# Altium PCB PCIE.PcbDoc
Units mil, origin at the board's own origin, x right, y up, seen from the top; angles counter-clockwise.
Board outline 6000 x 4000 mil, 2 copper layers (Top Layer, Bottom Layer); 2 components, 23 nets, 74 pads, 54 vias.
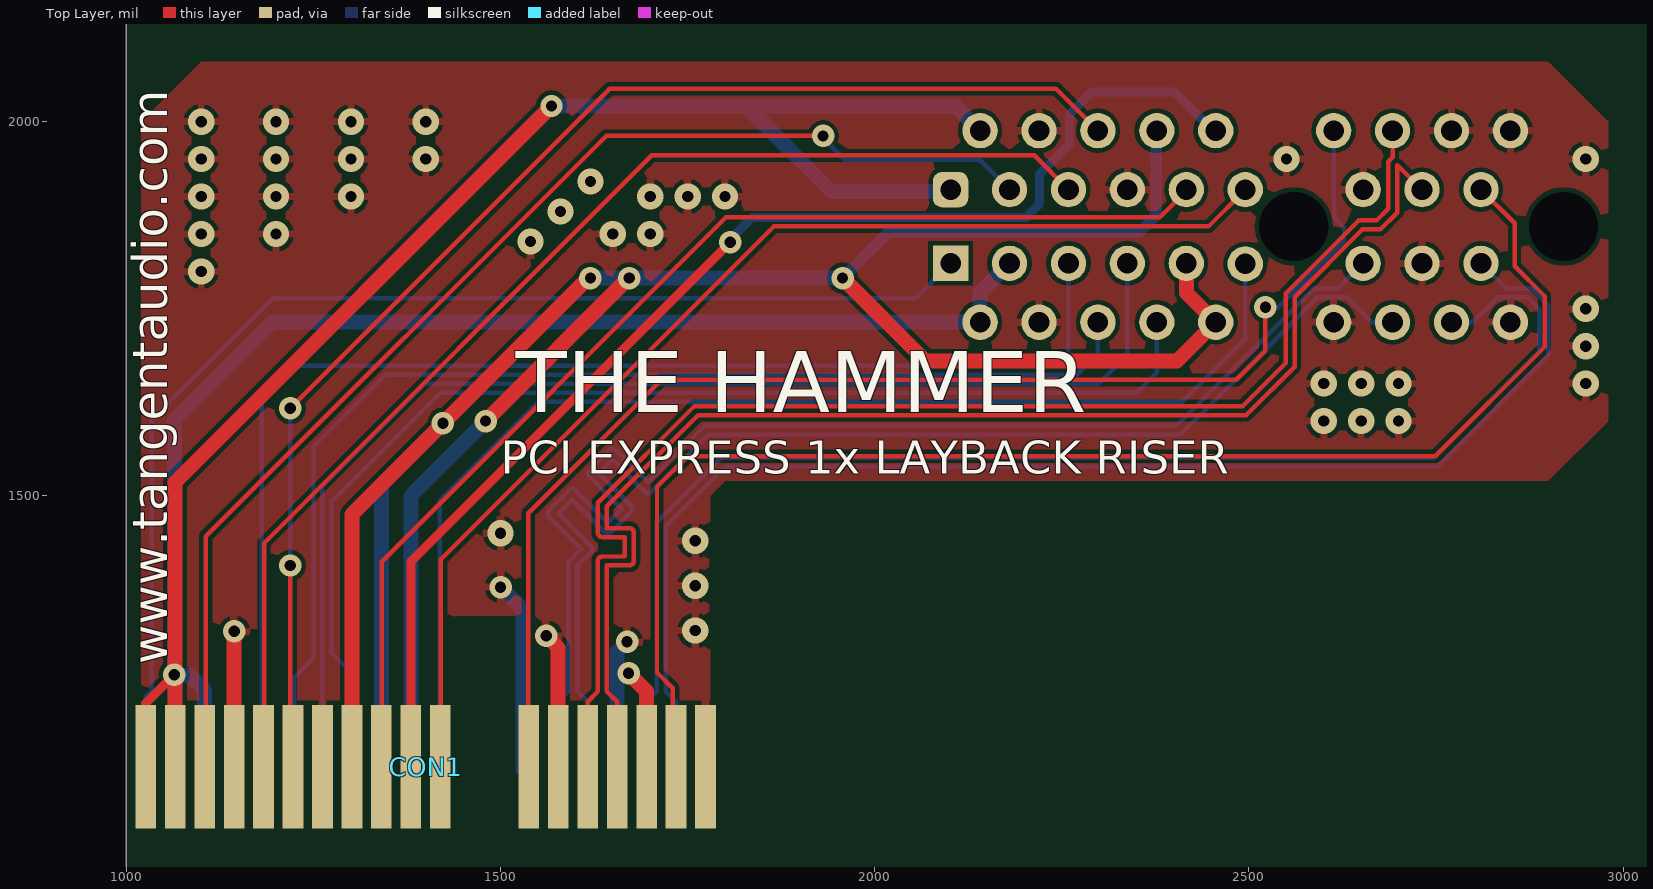
[diagram p0: Top Layer view]
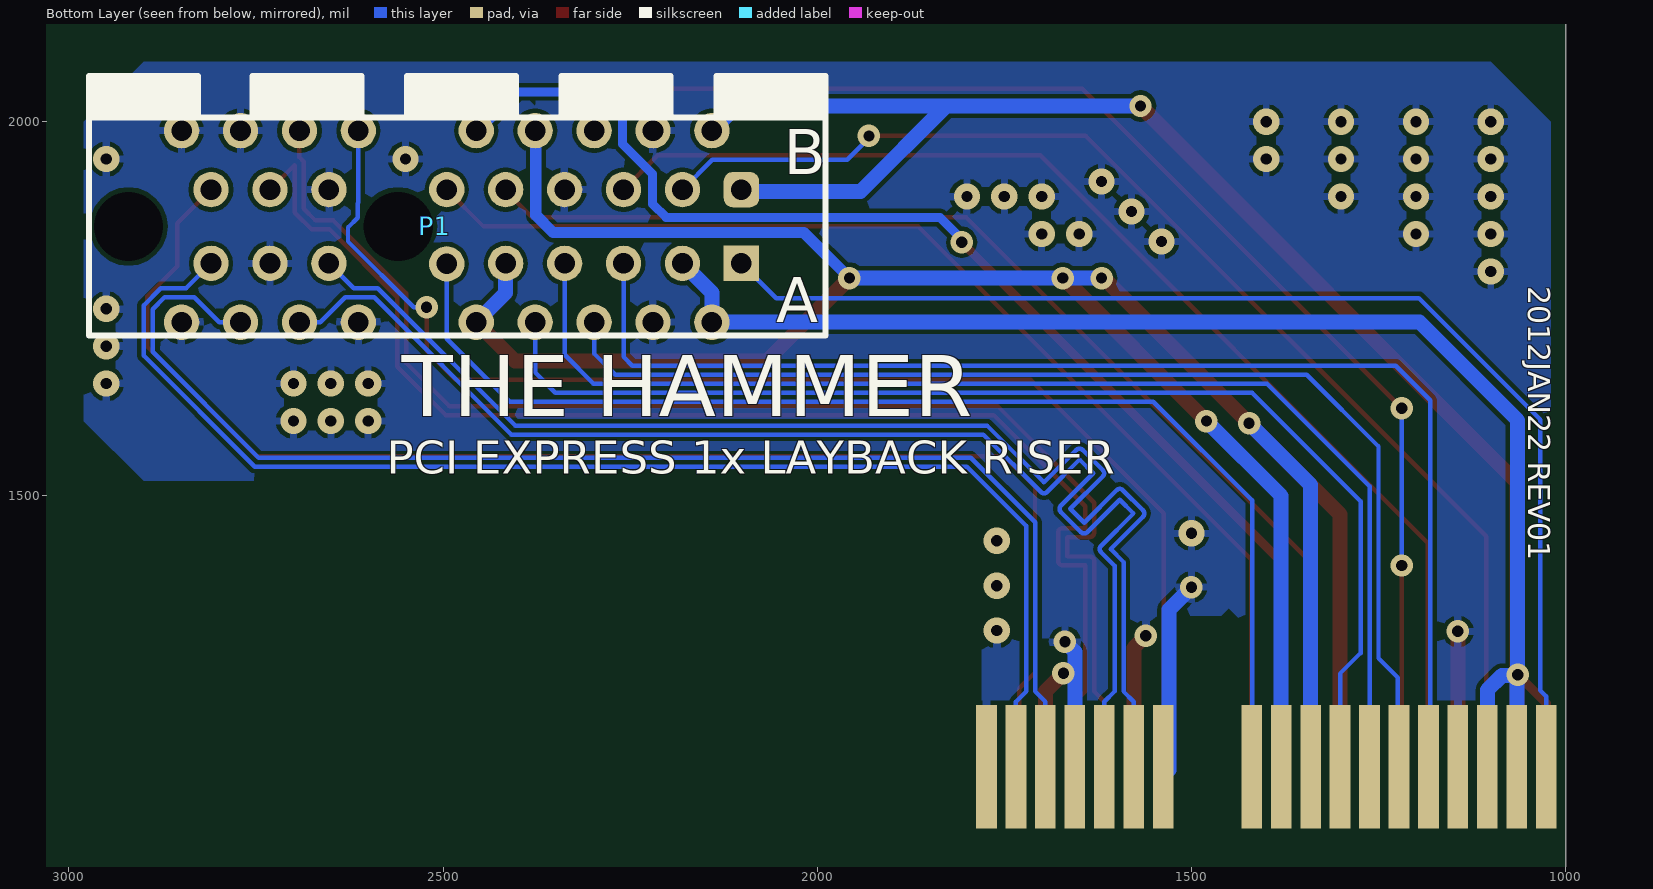
[diagram p1: Bottom Layer view, seen from below]

## Layer stack, top to bottom
Top Layer: signal copper 1.4
Dielectric: dielectric 12.6, FR-4, Dk 4.8
Bottom Layer: signal copper 1.4

## Board outline
1000,1000 7000,1000 7000,5000 1000,5000

## Design rules (kind name [scope] priority, off if disabled: settings)
Clearance [All] p1: gap=6
ComponentClearance [All] p1: gap=10 collisioncheckmode=3 verticalgap=10
DiffPairsRouting [All] p1: maxlimit=25 minlimit=6 mostfreqgap=10 toplayer_prefgap=6 bottomlayer_prefgap=6 maxuncoupledlength=500
HoleSize [All] p1: absolutevalues=TRUE maxlimit=125 minlimit=13 maxpercent=80.000 minpercent=20.000
MinimumAnnularRing [All] p1: minimumring=7
PolygonConnect [All] p1: connectstyle=Relief reliefconductorwidth=10 reliefentries=4 polygonreliefangle="90 Angle"
RoutingCorners [All] p1: cornerstyle=Round minsetback=100 maxsetback=100
RoutingVias [All] p1: holewidth=15 width=30 viastyle="Through Hole" minholewidth=15 minwidth=30 maxholewidth=15 maxwidth=30
SolderMaskExpansion [All] p1: expansion=4
TestPointUsage [All] p1: valid=0 allowmultiple=FALSE
Testpoint [All] p1: side=15 testpointundercomponent=TRUE minsize=40 maxsize=100 preferedsize=60 minholesize=0 maxholesize=40 preferedholesize=32 testpointgrid=1 style=1023 order=0-112345678
Width [All] p1: maxlimit=20 minlimit=6 preferedwidth=8
15 further rules are at their usual default settings.

## Classes and differential pairs
differential pair REFCLK: +REFCLK_P -REFCLK_N
differential pair HSO: +HSO_P -HSO_N
differential pair HSL: +HSL_P -HSL_N

## Components (designator, comment, footprint, x,y, rotation, side; value= is the part's Value field where it differs from the comment)
CON1 "PCIE_1X" PCIE_1X_EDGE 1025.79,1138.03 r0 top
P1 "PCIE_1X" NWE18DHHN-T931 2560,1860 r0 bottom

## Footprints (in the part's own frame and the unit in brackets; to place one, negate y for a bottom-side part, rotate by r counter-clockwise, add the part's x,y. Pads: shape width x height; smd on the part's side, far side on the other; paste and mask are expansions set on the pad)
NWE18DHHN-T931 [mm] "Sullins PCIe 1x through hole"
  rect 1.2x1.2 hole 0.7: A1(-11.65,1.25)
  round 1.2 hole 0.7: A2(-10.65,3.25) A3(-9.65,1.25) A4(-8.65,3.25) A5(-7.65,1.25) A6(-6.65,3.25) A7(-5.65,1.25) A8(-4.65,3.25) A9(-3.65,1.25) A10(-2.65,3.25) A11(-1.65,1.27) A12(1.35,3.25) A13(2.35,1.25) A14(3.35,3.25) A15(4.35,1.25) A16(5.35,3.25) A17(6.35,1.25) A18(7.35,3.25) B2(-10.65,-3.25) B3(-9.65,-1.25) B4(-8.65,-3.25) B5(-7.65,-1.25) B6(-6.65,-3.25) B7(-5.65,-1.25) B8(-4.65,-3.25) B9(-3.65,-1.25) B10(-2.65,-3.25) B11(-1.65,-1.25) B12(1.35,-3.25) B13(2.35,-1.25) B14(3.35,-3.25) B15(4.35,-1.25) B16(5.35,-3.25) B17(6.35,-1.25) B18(7.35,-3.25)
  rrect50% 1.2x1.2 hole 0.7: B1(-11.65,-1.25)
  round 0 hole 2.35 unplated: ""(0,0) ""(9.15,0)
  silkscreen extent -14.5,-5.1 10.5,3.7
PCIE_1X_EDGE [mm]
  rect 0.7x4.2 smd far side: A1(0,0) A2(1,0) A3(2,0) A4(3,0) A5(4,0) A6(5,0) A7(6,0) A8(7,0) A9(8,0) A10(9,0) A11(10,0) A12(13,0) A13(14,0) A14(15,0) A15(16,0) A16(17,0) A17(18,0) A18(19,0)
  rect 0.7x4.2 smd: B1(0,0) B2(1,0) B3(2,0) B4(3,0) B5(4,0) B6(5,0) B7(6,0) B8(7,0) B9(8,0) B10(9,0) B11(10,0) B12(13,0) B13(14,0) B14(15,0) B15(16,0) B16(17,0) B17(18,0) B18(19,0)

## Via types
v1: diameter 35, hole 15, Top Layer to Bottom Layer, 34 vias
v2: diameter 30, hole 15, Top Layer to Bottom Layer, 16 vias
v3: diameter 35, hole 15, Top Layer to Bottom Layer, tented both sides, 3 vias
v4: diameter 30, hole 15, Top Layer to Bottom Layer, tented both sides, 1 vias

## Nets (pads, with @x,y where several pads share a name; then routed paths per layer and width w, separated by ;. In a path a pad name is that pad's centre, name@x,y a point inside that pad or via, vN(x,y) a via of type N, cw(c..) or ccw(c..) an arc to the next point about the centre after c; other vN are vias at no path point)
+3.3V: CON1.A9 CON1.A10 CON1.B8 P1.A9 P1.A10 P1.B8 | length 3713.6
  Top Layer w20: CON1.B8 1301.38,1475.38 1617,1791 v2(1620,1791) ; v2(1480,1600) v2@1671,1791 ; v2(1957,1791) 2068,1680 2403.62,1680 P1.A10 2416.3,1771.42 P1.A9
  Bottom Layer w15: v2(1957,1791) 2018,1852 2353,1852 2376,1875 2376,1987.02 P1.B8
  Bottom Layer w20: CON1.A9 1340.75,1514.75 v2(1423,1597) ; CON1.A10 1380.12,1500.12 v2(1480,1600) ; v2(1620,1791) v2(1957,1791) ; P1.A9 2416.3,1771.42 P1.A10
  other v2: 1672,1791
+3.3VAUX: CON1.B10 P1.B10 | length 1680.5
  Top Layer w12: CON1.B10 1380.12,1412.12 v2(1807,1839)
  Bottom Layer w12: v2(1807,1839) 1810,1842 1810,1846 1836,1872 2202,1872 2220,1890 2220,1930 2260,1970 2260,2010 2290,2040 2400,2040 2452.05,1987.95 P1.B10
+12V: CON1.A2 CON1.A3 CON1.B1 CON1.B2 P1.A2 P1.A3 P1.B1 P1.B2 | length 3977.2
  Top Layer w12: CON1.B1 1025.79,1222.79 v2(1064,1261)
  Top Layer w20: CON1.B2 1065.16,1518.16 v2(1568,2021)
  Bottom Layer w20: CON1.A2 v2@1065.16,1259.84 ; CON1.A3 1104.53,1240.47 1085,1260 1065,1260 v2(1064,1261) 1064,1601 1195.05,1732.05 P1.A2 2140.71,1771.42 P1.A3 ; v2(1568,2021) 2107.66,2021 P1.B2 ; 1828,2021 1942,1907 2099.13,1907 P1.B1
B3_RSVD: CON1.B3 P1.B3 | length 1635.8
  Top Layer w6: CON1.B3 1106,1139.5 1106,1446 1641,1981 v2(1931,1981)
  Bottom Layer w6: v2(1931,1981) 1931,1978 1960,1949 2140.29,1949 P1.B3
B12_RSVD: CON1.B12 P1.B12 | length 1767.2
  Top Layer w6: CON1.B12 1537,1138.63 1537,1477 1715,1655 2483,1655 2522,1694 v4(2522,1752)
  Bottom Layer w6: v4(2522,1752) 2539,1752 2627,1840 2627,1858.73 2614,1871.73 2614,1891 2613.15,1891.85 P1.B12
GND: CON1.A4 CON1.A12 CON1.A15 CON1.A18 CON1.B4 CON1.B7 CON1.B13 CON1.B16 CON1.B18 P1.A4 P1.A12 P1.A15 P1.A18 P1.B4 P1.B7 P1.B13 P1.B16 P1.B18 | length 935.4
  Top Layer w20: CON1.B4@1144,1129 v2(1144,1319) ; v2(1561,1313) 1576.97,1297.03 CON1.B13 ; v2(1671,1263) 1695.08,1238.92 CON1.B16
  Bottom Layer w20: v2(1500,1378) 1530,1348 CON1.A12@1530,1134 ; CON1.A15 1655.71,1291.71 v2(1669,1305)
  other v1: 1760,1320 1760,1380 1760,1440 1500,1450 2600,1600 2650,1600 2700,1600 2600,1650 2650,1650 2700,1650 2950,1650 2950,1700 1100,1800 1540,1840 1100,1850 1200,1850 1650,1850 1700,1850 1580,1880 1100,1900 1200,1900 1300,1900 1700,1900 1750,1900 1800,1900 1620,1920 1100,1950 1200,1950 1300,1950 1400,1950 1100,2000 1200,2000 1300,2000 1400,2000
  other v3: 2950,1750 2550,1950 2950,1950
HSL_N: CON1.A17 P1.A17 | length 1781.3
  Bottom Layer w6: CON1.A17 1734.45,1225 1720.76,1238.68 1720.76,1459.79 1799.97,1539 2751.49,1539 2900,1687.51 2900,1754.49 2877.07,1777.42 2843.37,1777.42 P1.A17
HSL_P: CON1.A16 P1.A16 | length 1800.8
  Bottom Layer w6: CON1.A16 1695.08,1225 1708.76,1238.68 1708.76,1464.76 1795,1551 2746.51,1551 2888,1692.49 2888,1749.51 2872.1,1765.42 2843.37,1765.42 2832.37,1765.42 2799,1732.05 P1.A16
HSO_N: CON1.B15 P1.B15 | length 1803.6
  Top Layer w6: CON1.B15 1655.71,1225 1642.02,1238.68 1642.02,1407 1672.02,1407 ccw(c1672.02,1413) 1678.02,1413 1678.02,1451 ccw(c1672.02,1451) 1672.02,1457 1642.02,1457 1642.02,1486.02 1764,1608 2496.49,1608 2561,1672.51 2561,1765.51 2651.49,1856 2675.49,1856 2698,1878.51 2698,1941.51 2698.48,1941.99 P1.B15
HSO_P: CON1.B14 P1.B14 | length 1805.4
  Top Layer w6: CON1.B14 1616.34,1225 1630.02,1238.68 1630.02,1413 cw(c1636.02,1413) 1636.02,1419 1666.02,1419 1666.02,1445 1636.02,1445 cw(c1636.02,1451) 1630.02,1451 1630.02,1490.99 1759.03,1620 2491.51,1620 2549,1677.49 2549,1770.49 2646.51,1868 2670.51,1868 2686,1883.49 2686,1946.49 2691.89,1952.38 P1.B14
PRSNT1: CON1.A1 P1.A1 | length 1621.2
  Bottom Layer w6: CON1.A1 1026,1138.24 1026,1232 1034,1240 1034,1602 1196,1764 2054.55,1764 P1.A1
PRSNT2: CON1.B17 P1.B17 | length 1893.4
  Top Layer w6: CON1.B17 1730,1142.48 1730,1243 1709,1264 1709,1512 1750,1553 2749,1553 2895,1699 2895,1767 2855,1807 2855,1864.21 P1.B17
PWRGOOD: CON1.A11 P1.A11 | length 1621.7
  Bottom Layer w6: CON1.A11 1419,1138.52 1419,1494 1551,1626 2411,1626 2495.04,1710.04 P1.A11
REFCLK_N: CON1.A14 P1.A14 | length 1784.6
  Bottom Layer w6: CON1.A14 1616.34,1225 1602.65,1238.68 1602.65,1406.65 1620.7,1424.69 ccw(c1616.45,1428.94) 1622.45,1428.94 ccw(c1616.45,1428.94) 1620.69,1433.19 1577.39,1476.48 1595.78,1494.87 1639.07,1451.57 ccw(c1643.32,1455.81) 1647.58,1451.57 1674.44,1478.44 ccw(c1670.19,1482.68) 1676.19,1482.68 ccw(c1670.19,1482.68) 1674.43,1486.93 1631.13,1530.22 1649.52,1548.61 1692.81,1505.32 ccw(c1697.06,1509.55) 1701.32,1505.32 1778,1582 2408.65,1582 2592.07,1765.42 2619.15,1765.42 2630.63,1765.42 2664,1732.05 P1.A14
REFCLK_P: CON1.A13 P1.A13 | length 1765.2
  Bottom Layer w6: CON1.A13 1576.97,1225 1590.65,1238.68 1590.65,1411.62 1607.97,1428.94 1564.66,1472.24 cw(c1568.91,1476.48) 1564.67,1480.74 1591.53,1507.6 ; 1591.52,1507.59 cw(c1595.78,1503.35) 1600.03,1507.59 ; 1600.02,1507.6 1643.32,1464.29 1661.71,1482.68 1618.4,1525.98 ; 1618.41,1525.97 cw(c1622.65,1530.22) 1618.41,1534.48 1645.28,1561.34 ; 1645.27,1561.33 cw(c1649.52,1557.09) 1653.77,1561.33 1697.06,1518.03 1773.03,1594 2403.68,1594 2587.1,1777.42 2619.15,1777.42 P1.A13
SMCLK: CON1.B5 P1.B5 | length 1607.6
  Top Layer w6: CON1.B5 1184,1138.76 1184,1437 1702,1955 2213.03,1955 P1.B5
SMDAT: CON1.B6 P1.B6 | length 1759.7
  Top Layer w6: v2(1219,1407) 1219,1141.67 CON1.B6 ; v2(1219,1617) 1646,2044 2242.14,2044 P1.B6
  Bottom Layer w6: v2(1219,1407) v2(1219,1617)
TCK: CON1.A5 P1.A5 | length 1717.6
  Bottom Layer w6: CON1.A5 1181,1140.3 1181,1628 1227,1674 2247,1674 2258.82,1685.82 P1.A5
TDI: CON1.A6 P1.A6 | length 1580.8
  Bottom Layer w6: CON1.A6 1224,1139.39 1224,1257 1250,1283 1250,1566 1346,1662 2270,1662 2298.19,1690.19 P1.A6
TDO: CON1.A7 P1.A7 | length 1645.5
  Bottom Layer w6: CON1.A7 1262.01,1513.01 1399,1650 2299,1650 2337.56,1688.56 P1.A7
TMS: CON1.A8 P1.A8 | length 1607.6
  Bottom Layer w6: CON1.A8 1301.38,1262.64 1274.01,1290.01 1274.01,1493.01 1419,1638 2350,1638 2376.93,1664.93 P1.A8
TRST: CON1.B9 P1.B9 | length 1556.4
  Top Layer w6: CON1.B9 1341,1138.28 1341,1412 1801,1872 2381,1872 2416.3,1907.3 P1.B9
WAKE: CON1.B11 P1.B11 | length 1556.9
  Top Layer w6: CON1.B11 1420,1138.54 1420,1415 1865,1860 2445.83,1860 P1.B11
pads on no net: P1.

## Polygon pours and split planes (outlines as drawn)
GND on Top Layer "Bottom Layer-No Net" (solid, remove dead copper): 1020,2000 1020,1200 1420,1200 1420,1320 1440,1340 1520,1340 1540,1320 1540,1300 1540,1203 1537,1200 1780,1200 1780,1500 1800,1520 2900,1520 2980,1600 2980,2000 2900,2080 1100,2080 1020,2000
GND on Bottom Layer "Bottom Layer-No Net" (solid, remove dead copper): 1020,2000 1020,1200 1420,1200 1420,1320 1450,1350 1460,1340 1520,1340 1520,1330 1530,1320 1537.6,1312.4 1537.6,1138.03 1773.82,1138.03 1780,1144.21 1780,1500 1800,1520 2900,1520 2980,1600 2980,2000 2900,2080 1100,2080 1020,2000

## Silkscreen, mask and mechanical layers (free items; w line width, h text height)
Top Overlay:
  text "THE HAMMER" at 1520,1585 h140
  text "PCI EXPRESS 1x LAYBACK RISER" at 1500,1515 h75
  text "www.tangentaudio.com" at 1070,1275 h80 r90
Bottom Overlay:
  text "2012JAN22 REV01" at 1060,1780 h50 r90
  text "THE HAMMER" at 2555,1580 h140
  text "PCI EXPRESS 1x LAYBACK RISER" at 2575,1515 h75
Mechanical 1:
  lines w0.39: 1000.2,1500.24 1000.2,1999.8 cw(c1100.39,1999.8) 1100.39,2100 2900,2100 cw(c2900,2000) 3000,2000 3000,1600 cw(c2900.24,1600) 2900.24,1500.24 1799.41,1500.24

## Text inside footprints (layer, text, board x,y; h text height)
P1: Bottom Overlay "B" at 2045,1930 h60; Bottom Overlay "A" at 2055,1732.05 h60